# Allegro board CADCAD.brd
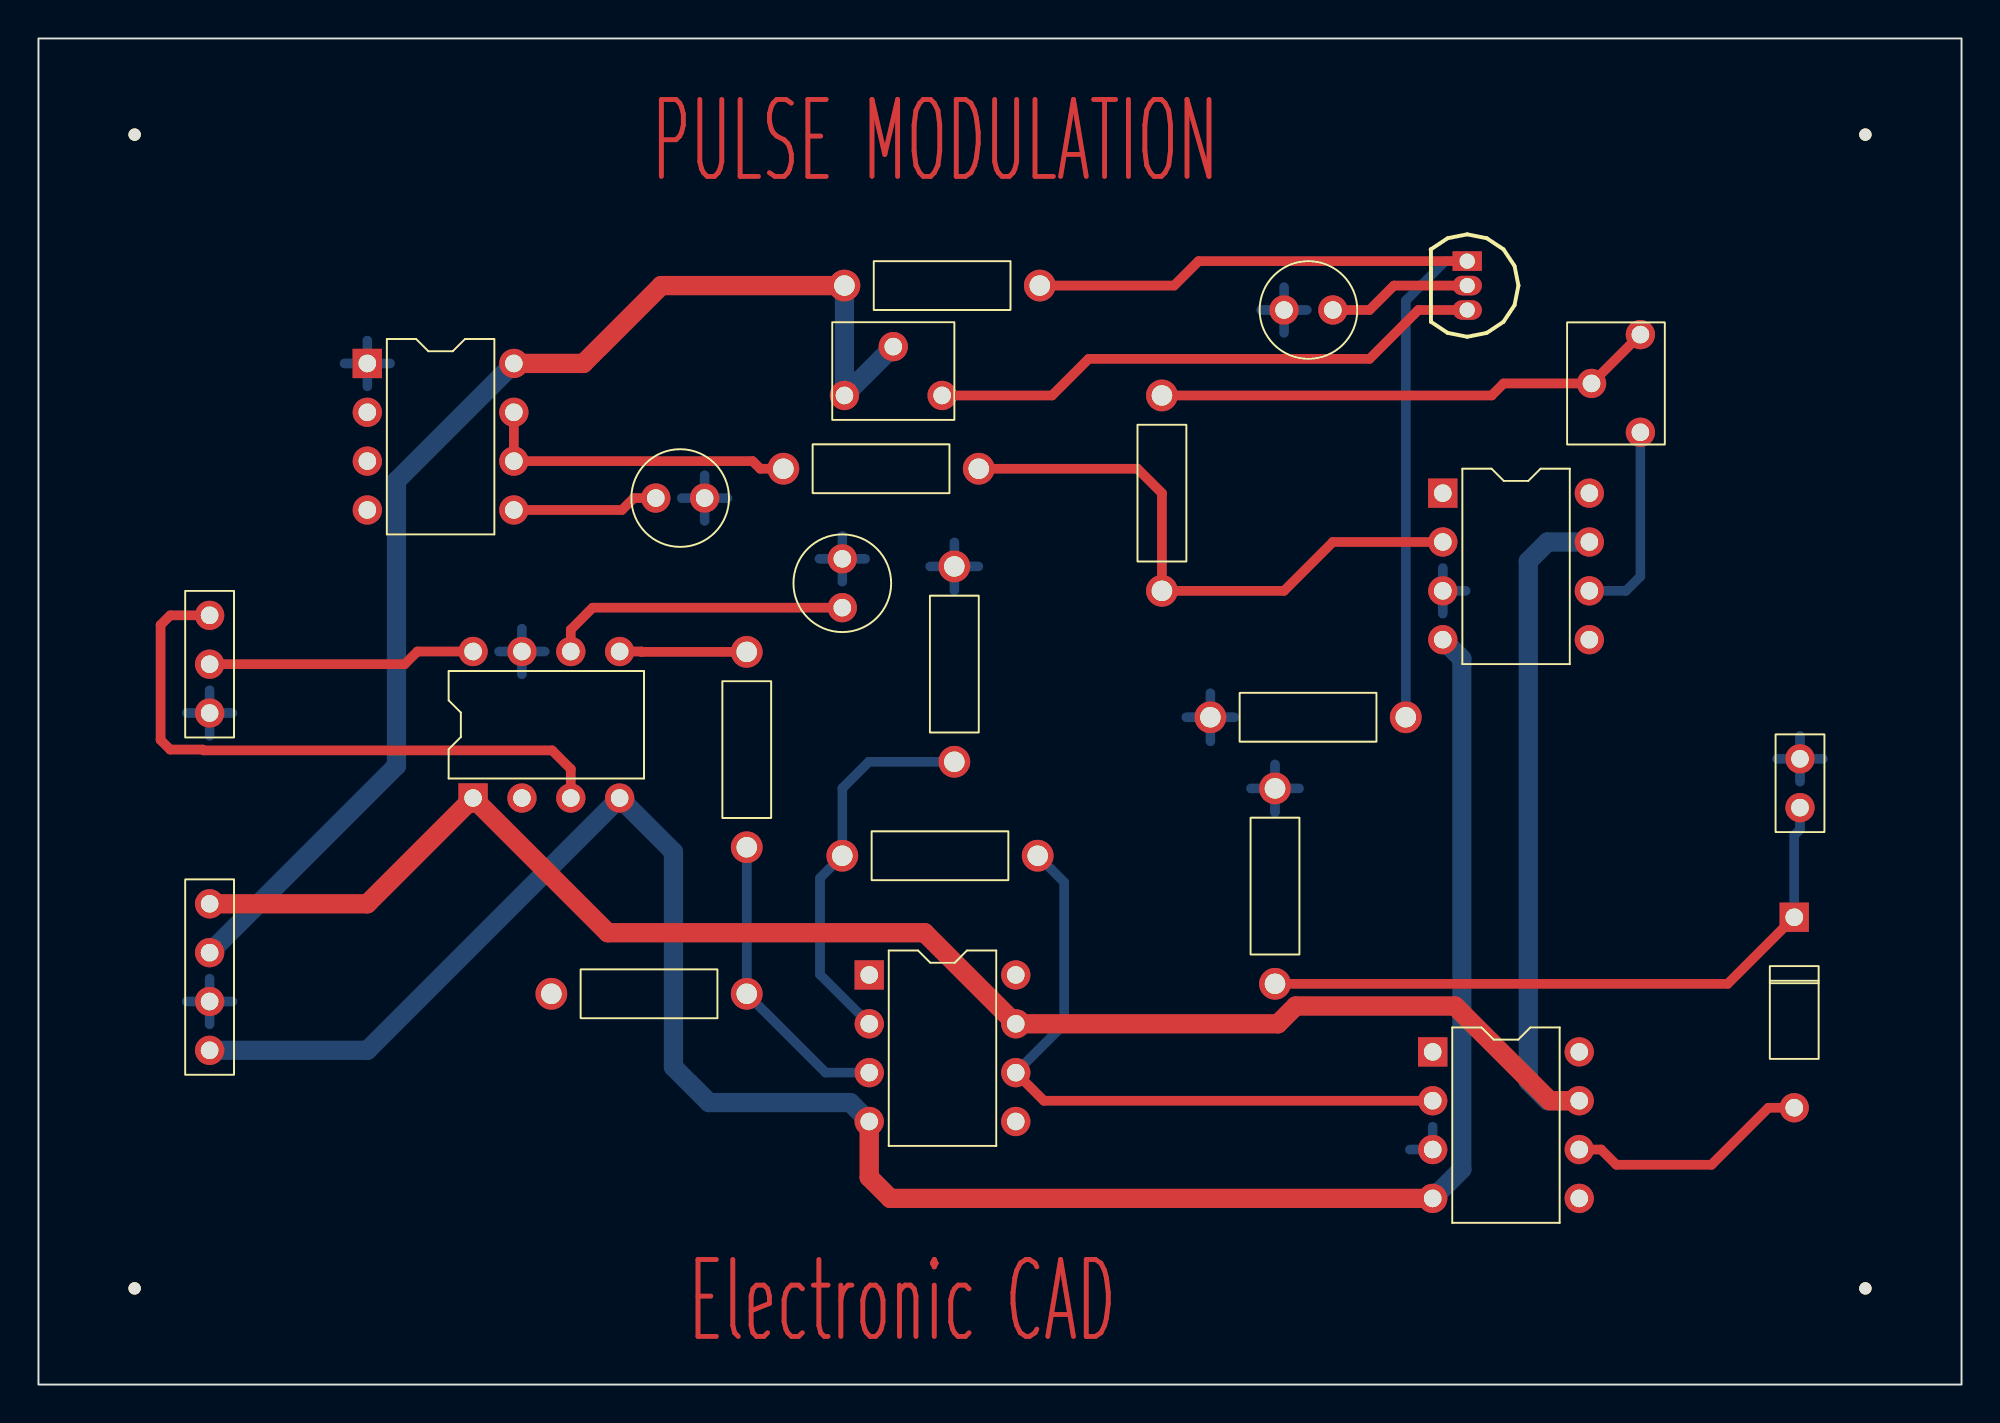
[diagram p0: board, top side]
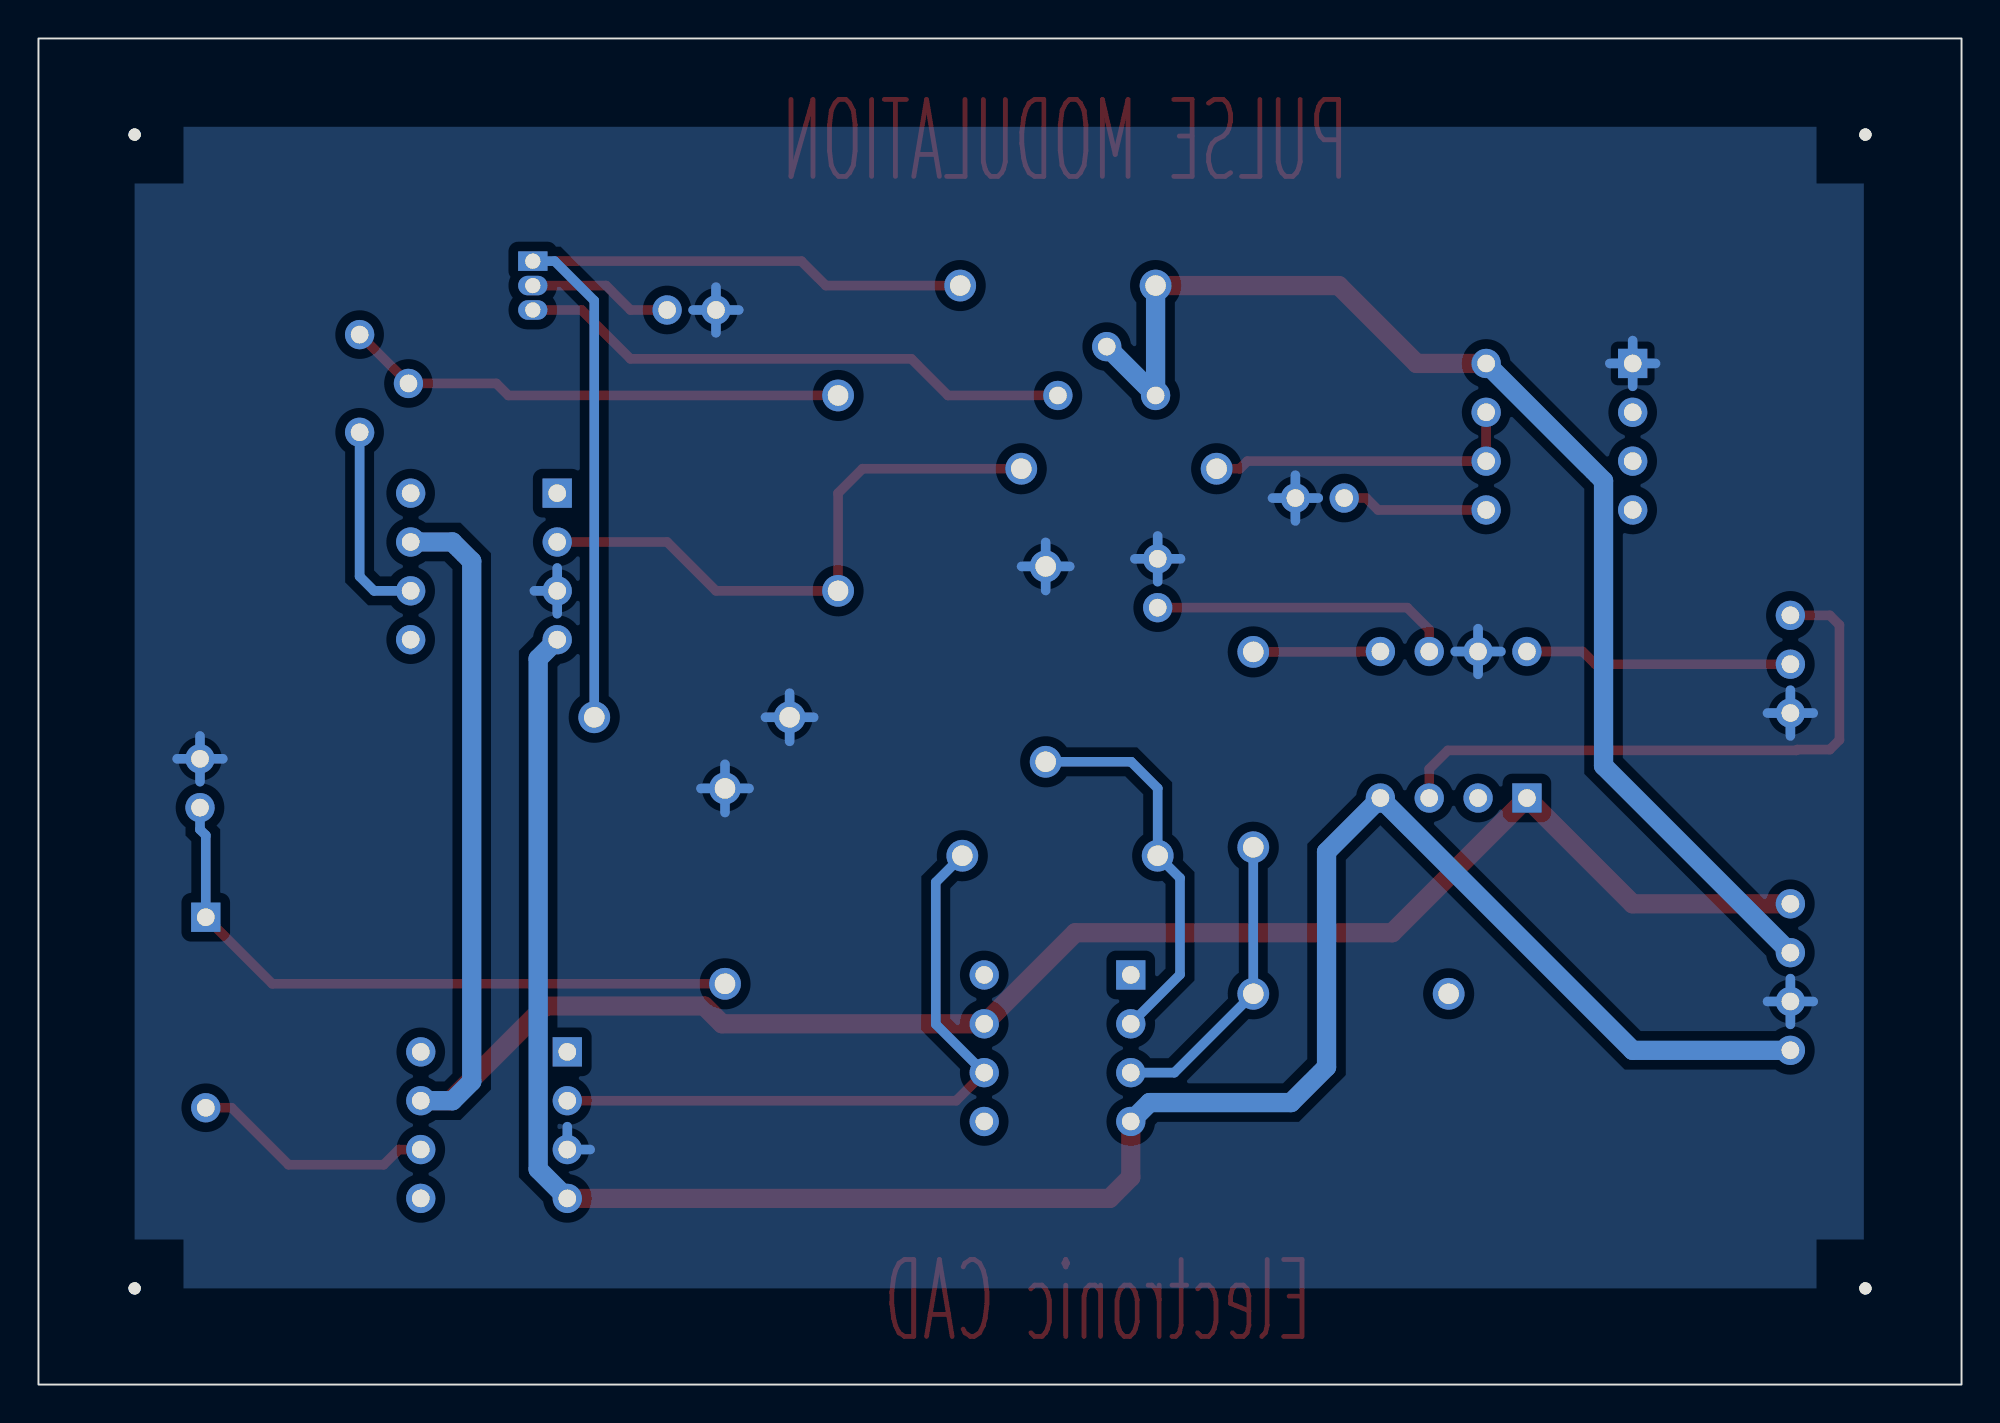
[diagram p1: board, bottom side, seen from below]

Outline 100 x 70 mm; copper layers: TOP, BOTTOM. Coordinates in mm from the lower left corner of the outline.
Outline path: rectangle 0,0 100,70

## Design rules (mm)
constraint set DEFAULT: min track width 0.5, pair gap 0.5
nets with their own width: min track width 0.5; nets GND
nets with their own width: min track width 1; nets +5V +15V -15V

## Placement (name value [footprint] x y rotation side)
C1  0.01uF  [CAP196]  67.31 55.88 90 top
C2  0.01uF  [CAP196]  32.1 46.1 270 top
C3  0.01uF  [CAP196]  41.8 40.4 0 top
D1  1S1588  [DO41]  91.3 24.3 180 top
J1  CON4  [JUMPER4]  8.9 25 270 top
J2  CON3  [JUMPER3]  8.9 40 270 top
J3  CON2  [JUMPER2]  91.6 30 90 top
NOREF  -  []  0 70 0 top
NOREF#2  -  [unnamed#2]  5 5 0 top
NOREF#3  -  []  100 0 90 top
NOREF#4  -  [unnamed#2]  95 5 0 top
NOREF#5  -  [unnamed#2]  95 65 0 top
NOREF#6  -  [unnamed#2]  5 65 0 top
Q1  2SA1015  [TO92]  74.3 58.42 270 top
R1  560  [RES400]  58.42 41.27 0 top
R2  39k  [RES400]  41.91 57.15 270 top
R3  6.2k  [RES400]  38.73 47.62 270 top
R4  100k  [RES400]  71.1 34.7 90 top
R5  10k  [RES400]  26.67 20.32 270 top
R6  10k  [RES400]  41.8 27.5 270 top
R7  10k  [RES400]  36.83 38.1 180 top
R8  10k  [RES400]  47.62 32.38 0 top
R9  10k  [RES400]  64.3 31 180 top
U1  NE555  [DIP8_3]  17.1 53.1 0 top
U2  LF356  [DIP8_3]  73.03 46.35 0 top
U3  LF398  [DIP8_3]  22.6 30.5 90 top
U4  LF356  [DIP8_3]  43.2 21.3 0 top
U5  LF356  [DIP8_3]  72.5 17.3 0 top
VR1  5k  [RESADJ]  46.99 51.44 270 top
VR2  20k  [RESADJ]  83.3 54.6 0 top

## Library data of the parts
C1-C3 = CAP NP: Tolerance: ***; User Part Number: ***
D1 = DIODE
J1 = CON4: User Part Number: ***
J2 = CON3: User Part Number: ***
J3 = CON2: User Part Number: ***
Q1 = PNP BCE
R1-R9 = R: Tolerance: ***; User Part Number: ***
U1 = NE555_7: Tolerance: ***; User Part Number: ***
U2 U4 U5 = LF356_4: Tolerance: ***; User Part Number: ***
U3 = LF398: Tolerance: ***; User Part Number: ***
VR1 VR2 = POT: Tolerance: ***; User Part Number: ***

## Footprints (pads in the part's own frame, mm; a bottom-side part is the same pattern mirrored in y, then rotated)
CAP196
  round 1.524 hole 0.914: 1(0,0) 2(0,2.54)
DIP8_3
  rect 1.524x1.524 hole 0.914: 1(0,0)
  round 1.524 hole 0.914: 2(0,-2.54) 3(0,-5.08) 4(0,-7.62) 5(7.62,-7.62) 6(7.62,-5.08) 7(7.62,-2.54) 8(7.62,0)
DO41
  rect 1.524x1.524 hole 0.914: 1(0,0)
  round 1.524 hole 0.914: 2(0,9.906)
JUMPER2
  round 1.524 hole 0.914: 1(0,0) 2(2.54,0)
JUMPER3
  round 1.524 hole 0.914: 1(0,0) 2(2.54,0) 3(5.08,0)
JUMPER4
  round 1.524 hole 0.914: 1(0,0) 2(2.54,0) 3(5.08,0) 4(7.62,0)
RES400
  round 1.651 hole 1.067: 1(0,0) 2(0,10.16)
RESADJ
  round 1.524 hole 0.914: 1(0,0) 2(-2.54,-2.54) 3(0,-5.08)
TO92
  rect 1.016x1.524 hole 0.787: 1(0,0)
  oval 1.016x1.524 hole 0.787: 2(1.27,0) 3(2.54,0)
unnamed#2
  round 0.635 hole 3.175 unplated: (0,0)

## Nets
+5V: J1.2 R2.1 U1.8(VCC) VR1.2(WIPER) VR1.3
+15V: J1.1 U2.7 U3.1 U4.7 U5.7
-15V: J1.4 U2.4(V-) U3.4(VCC-) U4.4(V-) U5.4(V-)
GND: C1.2 C2.2 C3.2 J1.3 J2.3 J3.2 R4.2 R8.2 R9.1 U1.1 U2.3 U3.7 U5.3
CLOCK: U1.2
PORTLEFT-L: R5.1
PORTLEFT-R: U2.6 VR2.3
N00381: C2.1 U1.5
N00392: R3.1 U1.6 U1.7
N00405: Q1.1 R2.2 R4.1
N00691: R1.1 R3.2 U2.2
N00760: R1.2 VR2.1 VR2.2(WIPER)
N01069: C1.1 Q1.2
N002560: Q1.3(E) VR1.1
N05345: R5.2 R7.2 U4.3
N05353: R6.1 R8.1 U4.2
N05361: R6.2 U4.6 U5.2
N05437: J2.1 U3.3
N05507: J2.2 U3.8
N05579: R7.1 U3.5
N05591: D1.1(K) J3.1 R9.2
N05639: C3.1 U3.6
N055510: D1.2 U5.6

Pads without a net: U1 3 4; U2 1 5 8; U3 2; U4 1 5 8; U5 1 5 8

## Routing (per net, layer and track width the routed paths; a pad name or vN(x,y) marks a point on that pad's centre or on a via; arc(x,y) is an arc through that point)
+5V: length 65.4
  TOP w1: R2.1 32.39,57.15 28.34,53.1 U1.8
  BOTTOM w1: J1.2 18.62,32.18 18.62,47 U1.8 ; VR1.2 VR1.3 R2.1
+15V: length 114.5
  TOP w1: J1.1 17.1,25 U3.1 29.61,23.5 46.09,23.5 U4.7 64.45,18.76 65.38,19.68 73.66,19.68 78.58,14.76 U5.7
  BOTTOM w1: 80.64,43.81 78.47,43.81 77.47,42.81 77.47,15.76 78.47,14.76 U5.7
-15V: length 116
  TOP w1: U4.4 43.2,10.78 44.3,9.68 U5.4
  BOTTOM w1: U2.4 74.02,37.74 74.02,11.2 U5.4 ; U4.4 42.22,14.66 34.87,14.66 33.02,16.51 33.02,27.7 U3.4 17.1,17.38 J1.4
GND: length 59
  BOTTOM w0.5: 72.5,13.41 U5.3 71.31,12.22 ; 47.62,41.29 R8.2 ; R8.2 47.62,43.8 ; R8.2 46.37,42.55 ; R8.2 48.88,42.55 ; J1.3 10.09,19.92 ; J1.3 8.9,18.73 ; J1.3 7.71,19.92 ; J1.3 8.9,21.11 ; J3.2 91.6,33.73 ; J3.2 91.6,31.35 ; J3.2 90.41,32.54 ; J3.2 92.79,32.54 ; 25.14,36.93 U3.7 ; U3.7 23.95,38.12 ; U3.7 25.14,39.31 ; U3.7 26.33,38.12 ; R9.1 64.3,32.25 ; R9.1 65.55,31 ; R9.1 64.3,29.75 ; R9.1 63.05,31 ; 63.58,55.88 C1.2 ; C1.2 64.77,54.69 ; C1.2 65.96,55.88 ; C1.2 64.77,57.07 ; J2.3 10.09,34.92 ; J2.3 8.9,36.11 ; J2.3 8.9,33.73 ; J2.3 7.71,34.92 ; R4.2 62.19,34.7 ; R4.2 60.94,35.95 ; R4.2 60.94,33.45 ; R4.2 59.69,34.7 ; C3.2 42.99,42.94 ; C3.2 41.8,41.75 ; C3.2 41.8,44.13 ; C3.2 40.61,42.94 ; C2.2 35.83,46.1 ; C2.2 34.64,44.91 ; C2.2 33.45,46.1 ; C2.2 34.64,47.29 ; 73.03,40.09 U2.3 ; U2.3 74.21,41.27 ; U2.3 73.03,42.46 ; 17.1,51.91 U1.1 ; U1.1 15.91,53.1 ; U1.1 17.1,54.29 ; U1.1 18.29,53.1
PORTLEFT-R: length 10.5
  BOTTOM w0.5: VR2.3 83.3,42.03 82.55,41.27 80.64,41.27
N00381: length 7.6
  TOP w0.5: C2.1 30.96,46.1 30.34,45.48 U1.5
N00392: length 16.7
  TOP w0.5: R3.1 37.53,47.62 37.14,48.02 U1.6 U1.7
N00405: length 48.5
  TOP w0.5: R2.2 59.05,57.15 60.32,58.42 Q1.1
  BOTTOM w0.5: R4.1 71.1,56.37 73.16,58.42 Q1.1
N00691: length 30.8
  TOP w0.5: U2.2 67.31,43.81 64.77,41.27 R1.1 58.42,46.36 57.15,47.62 48.9,47.62
N00760: length 26.2
  TOP w0.5: R1.2 75.56,51.44 76.19,52.06 VR2.2 VR2.1
N01069: length 7.5
  TOP w0.5: Q1.2 70.48,57.15 69.21,55.88 C1.1
N002560: length 29.1
  TOP w0.5: Q1.3 71.75,55.88 69.22,53.34 54.61,53.34 52.7,51.44 VR1.1
N05345: length 15.7
  BOTTOM w0.5: U4.3 40.93,16.22 R5.2 R7.2
N05353: length 20.2
  BOTTOM w0.5: R8.1 43.18,32.38 41.8,31 R6.1 40.64,26.34 40.64,21.32 U4.2
N05361: length 35.2
  TOP w0.5: U5.2 52.28,14.76 U4.6
  BOTTOM w0.5: U4.6 53.34,18.74 53.34,26.12 R6.2
N05437: length 32.2
  TOP w0.5: J2.1 6.85,40 6.35,39.5 6.35,33.52 6.85,33.02 8.54,33.02 8.59,32.98 26.71,32.98 27.68,32.01 U3.3
N05507: length 14
  TOP w0.5: J2.2 19.04,37.46 19.7,38.12 U3.8
N05579: length 6.6
  TOP w0.5: U3.5 31.36,38.12 31.36,38.1 R7.1
N05591: length 34.3
  TOP w0.5: R9.2 87.84,20.84 D1.1
  BOTTOM w0.5: D1.1 91.3,28.56 91.6,28.86 J3.1
N05639: length 15.7
  TOP w0.5: C3.1 28.82,40.4 27.68,39.26 U3.6
N055510: length 12.7
  TOP w0.5: U5.6 81.26,12.22 82.05,11.43 87,11.43 89.96,14.39 D1.2

## Copper pours and planes (outline as drawn; the poured copper is in the pictures)
GND on BOTTOM: 95,5 95,65.41 5.08,65.41 5.08,5

## Text on the board
TOP: PULSE MODULATION | Electronic CAD
DEVICE_TYPE_TOP: FIGURE | FINISHED_SIZE | 0.787 | 0.914 | 1.067 | 3.175 | DRILL CHART: TOP to BOTTOM | ALL UNITS ARE IN MILLIMETERS | PLATED | NON-PLATED | QTY | 3 | 63 | 18 | 4
